# Altium PCB mchf_pro_ui.PcbDoc (part 5 of 6)
Units mm, origin at the board's own origin, x right, y up, seen from the top; angles counter-clockwise.
Board outline 200.09 x 143.79 mm, 2 copper layers (Top Layer, Bottom Layer); 329 components, 335 nets, 1276 pads, 515 vias.
Unrouted connection lines stored in the file: 91.
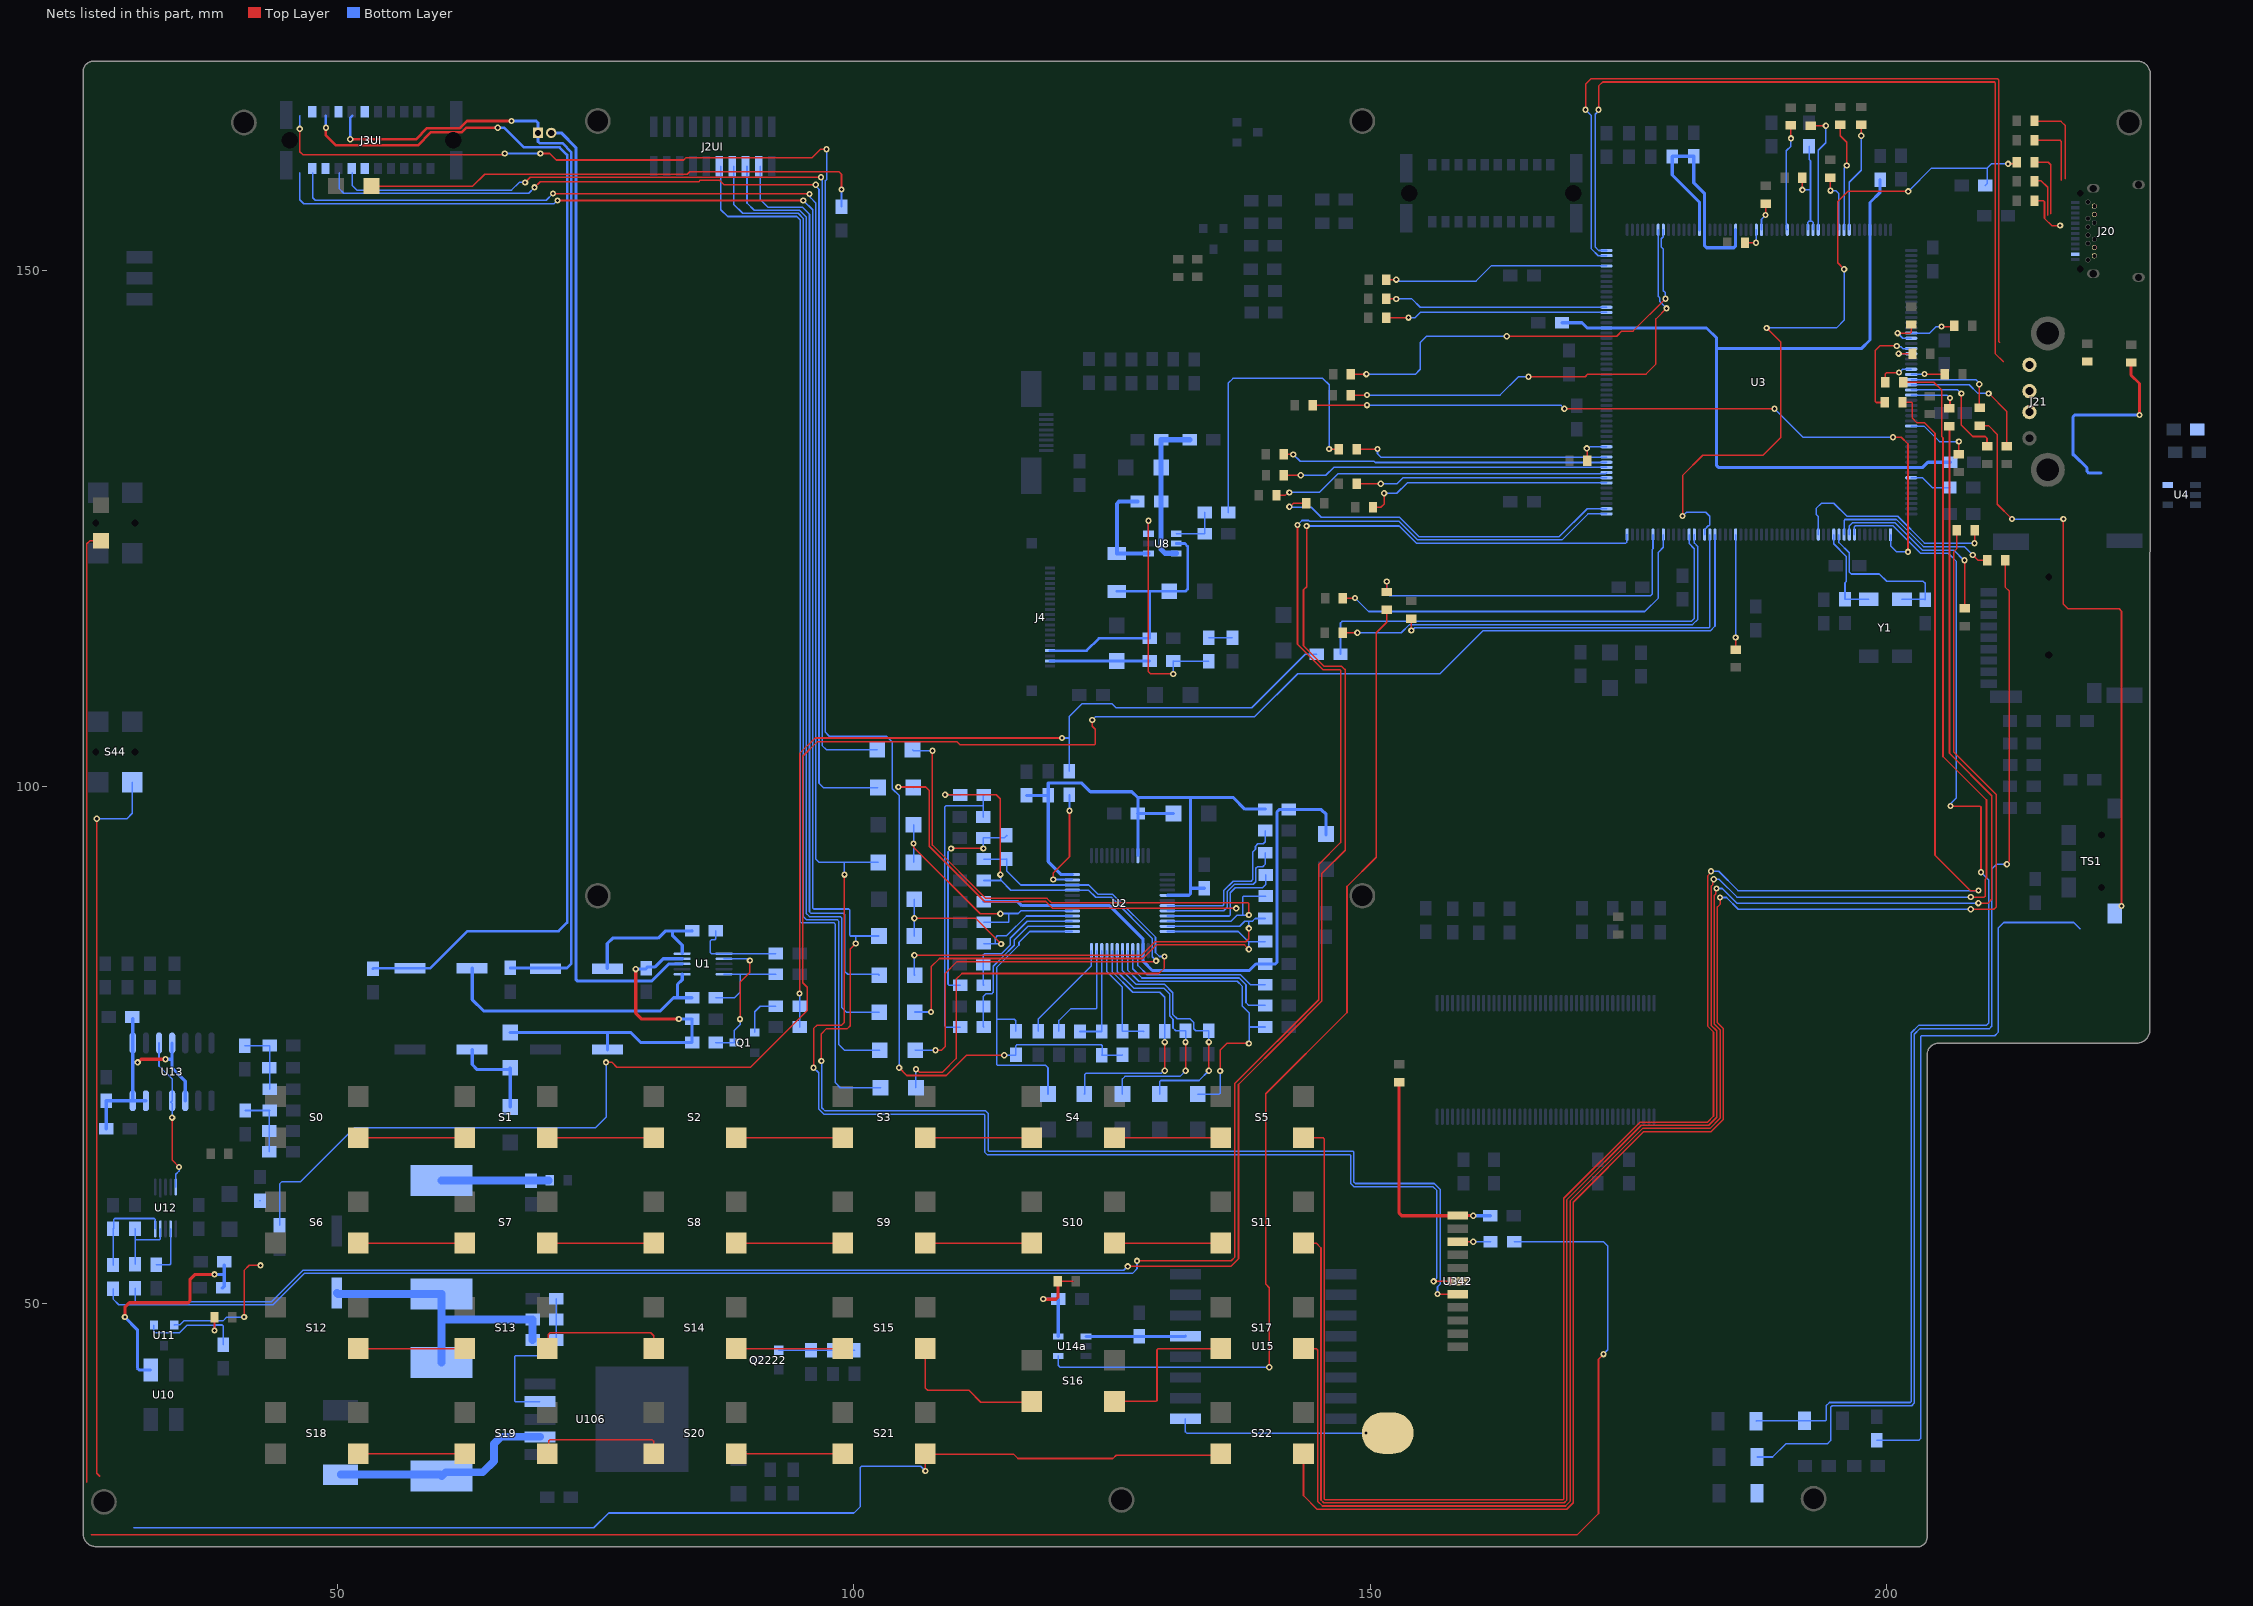
[diagram p4: the nets of this part, all layers, seen from the top]

## Via types
v1: diameter 0.61, hole 0.305, Top Layer to Bottom Layer, 511 vias
v2: diameter 0.762, hole 0.381, Top Layer to Bottom Layer, 4 vias

## Nets (pads, with @x,y where several pads share a name; then routed paths per layer and width w, separated by ;. In a path a pad name is that pad's centre, name@x,y a point inside that pad or via, vN(x,y) a via of type N, cw(c..) or ccw(c..) an arc to the next point about the centre after c; other vN are vias at no path point) (continued)
KEYPAD_Y1: M9.1 S5.4 | length 209.5
  Top Layer w0.152: S5.4@143.515,66.024 145.424,66.024 145.514,65.935 145.514,31.076 145.603,30.987 168.626,30.987 168.715,31.076 168.715,60.167 176.086,67.537 182.614,67.537 183.207,68.13 183.207,76.257 182.665,76.799 182.665,91.405 182.955,91.694 v1(182.955,91.818) ; M9.1@201.546,137.232 202.376,137.232 202.465,137.142 202.465,135.664 202.909,135.22 203.645,135.22 204.65,134.215 204.65,93.365 208.063,89.951 v1(208.861,89.951)
  Bottom Layer w0.152: v1(182.955,91.818) 183.709,91.818 185.576,89.951 v1(208.861,89.951)
KEYPAD_Y2: M13.1 S11.4 | length 202.5
  Top Layer w0.152: S11.4@143.515,55.83 144.744,55.83 145.209,55.365 145.209,32.063 145.209,31.297 145.209,30.95 145.477,30.682 168.752,30.682 169.02,30.95 169.02,31.299 169.02,32.745 169.02,60.04 176.212,67.232 182.741,67.232 183.512,68.004 183.512,76.383 182.97,76.925 182.97,90.375 183.146,90.551 183.146,90.967 v1(183.234,91.054) ; M13.1@201.564,139.168 204.536,139.168 205.298,138.406 205.298,133.911 205.42,133.788 205.42,102.933 209.633,98.719 209.633,91.139 209.515,91.021 209.515,89.412 209.426,89.323 v1(208.101,89.323)
  Bottom Layer w0.152: v1(183.234,91.054) 183.743,91.054 185.475,89.323 v1(208.101,89.323)
KEYPAD_Y3: M7.1 S17.4 | length 185.3
  Top Layer w0.152: S17.4@143.515,45.62 144.744,45.62 144.904,45.459 144.904,31.171 144.904,30.823 145.351,30.377 168.879,30.377 169.325,30.823 169.325,31.173 169.325,32.566 169.325,59.914 176.338,66.928 182.867,66.928 183.843,67.903 183.843,76.483 183.284,77.042 183.284,89.479 183.426,89.621 183.426,90.076 v1(183.504,90.154) ; M7.1@206.049,134.914 206.049,103.234 210.15,99.133 210.15,89.112 209.773,88.735 v1(208.844,88.735)
  Bottom Layer w0.152: v1(183.504,90.154) 184.052,90.154 185.472,88.735 v1(208.844,88.735)
KEYPAD_Y4: M6.1 S22.4 | length 165.3
  Top Layer w0.152: S22.4@143.515,35.435 143.515,31.387 144.83,30.072 169.005,30.072 169.63,30.697 169.63,59.788 176.465,66.623 182.993,66.623 184.16,67.789 184.16,76.597 183.589,77.168 183.589,88.36 183.843,88.614 v1(183.843,89.283) ; M6.1@206.768,124.825 206.768,123.057 206.448,122.737 206.448,103.388 210.574,99.262 210.574,88.37 210.343,88.139 v1(208.115,88.139)
  Bottom Layer w0.152: v1(183.843,89.283) 184.463,89.283 185.595,88.152 208.102,88.152 v1(208.115,88.139)
LCD_BL_A: C57.1 C58.2 D19.2 J4.4 U8.5 | length 27
  Bottom Layer w0.254: J4.4@118.975,113.175 122.509,113.175 123.705,114.37 C58.2@128.614,114.37 128.614,118.925 ; D19.2@125.446,118.91 125.461,118.925 128.614,118.925 ; U8.5@131.206,123.543 132.032,123.543 132.3,123.275 132.3,119.15 132.075,118.925 C57.1@130.527,118.925 128.614,118.925
LCD_BL_CTRL: M66.1 R48.1 | length 29.9
  Top Layer w0.152: v1(145.999,132.691) M66.1@146.941,132.691
  Bottom Layer w0.152: R48.1@136.242,126.55 136.242,139.075 136.692,139.525 145.388,139.525 145.999,138.914 v1(145.999,132.691)
LCD_BL_K: J4.2 R51.2 R52.2 | length 9.6
  Bottom Layer w0.254: J4.2@118.975,112.175 R52.2@125.446,112.175 R51.2@128.614,112.175
LCD_VDD: C53.2 C55.1 RFC4.2 RFC5.1 U8.6 | length 15
  Bottom Layer w0.508: U8.6@131.206,122.593 130.132,122.593 129.976,122.749 129.736,122.989 RFC5.1@129.736,127.619 C55.1@129.736,130.914 C53.2@129.736,133.6 RFC4.2@132.514,133.6
LINE_IN_L: C16.2 J3UI.A4 | length 112.5
  Top Layer w0.152: v1(69.075,158.02) 69.63,158.575 84.975,158.575 85.092,158.692 87.008,158.692 87.425,158.275 v1(96.31,158.275)
  Bottom Layer w0.152: 50.16,159.45 50.16,157.92 50.625,157.455 68.525,157.455 69.075,158.005 v1(69.075,158.02) ; v1(96.31,158.275) 96.31,158.151 96.615,157.846 96.615,100.335 97.025,99.925 C16.2@102.325,99.925
LINE_IN_R: C17.2 J3UI.A5 | length 107.9
  Top Layer w0.152: v1(68.175,158.5) 68.672,158.997 v1(96.817,158.997)
  Bottom Layer w0.152: 51.43,159.45 51.43,158.205 51.875,157.76 66.85,157.76 67.59,158.5 v1(68.175,158.5) ; v1(96.817,158.997) 96.831,158.997 96.92,158.908 96.92,103.995 97.34,103.575 C17.2@102.25,103.575
LINE_OUT_L: C10.2 J3UI.A1 U342.7 | length 227.8
  Top Layer w0.152: v1(71.303,156.75) v1(95.1,156.75) ; v1(96.85,73.45) 96.85,76.104 97.34,76.595 99.37,76.595 99.65,76.875 99.65,84.293 v1(100.182,84.825) ; v1(156.492,50.892) 158.438,50.892 U342.7@158.45,50.88
  Bottom Layer w0.152: 46.35,159.45 46.35,156.825 46.75,156.425 70.978,156.425 v1(71.303,156.75) ; v1(95.1,156.75) 96.006,155.844 96.006,88.261 96.095,88.172 99.488,88.172 99.577,88.082 99.577,85.647 99.666,85.558 100.182,85.558 ; v1(96.85,73.45) 96.89,73.41 96.89,68.932 97.202,68.62 112.757,68.62 112.987,68.39 112.987,64.793 113.076,64.704 148.312,64.704 148.401,64.615 148.401,61.744 148.549,61.596 156.187,61.596 156.739,61.044 156.739,51.851 156.492,51.604 v1(156.492,50.892) ; v1(100.182,84.825) 100.182,85.558 ; C10.2@102.42,85.558 100.182,85.558
LINE_OUT_R: C11.2 J3UI.A2 U342.6 | length 226.5
  Top Layer w0.152: v1@70.836,157.389 v1(95.701,157.389) ; v1(96.095,72.8) 96.095,76.595 96.425,76.925 98.8,76.925 99.083,77.208 v1(99.083,91.495) ; v1(156.113,52.126) 158.426,52.126 U342.6@158.45,52.15
  Bottom Layer w0.152: 47.62,159.45 47.62,157.005 47.85,156.775 70.221,156.775 v1(70.878,157.433) ; v1(95.701,157.389) 95.788,157.302 95.788,157.041 96.31,156.519 96.31,92.998 96.633,92.675 99.083,92.675 ; v1(96.095,72.8) 96.586,72.309 96.586,68.805 97.076,68.315 112.593,68.315 112.682,68.226 112.682,64.605 112.888,64.399 148.007,64.399 148.096,64.31 148.096,61.607 148.412,61.291 156.061,61.291 156.434,60.917 156.434,52.447 v1(156.113,52.126) ; v1(99.083,91.495) 99.083,92.675 ; C11.2@102.345,92.675 99.083,92.675
LO_SCL: R57.2 U3.52 | length 220.3
  Top Layer w0.152: v1(126.5,53.575) 136.49,53.575 137.225,54.31 137.225,71.185 142.175,76.135 142.175,76.15 145.293,79.268 145.293,91.594 147.563,93.864 147.563,111.362 147.5,111.362 147.195,111.667 145.491,111.667 143.519,113.639 143.519,119.069 143.824,119.374 v1(143.824,125.245)
  Bottom Layer w0.152: R57.2@30.412,51.476 30.412,50.256 30.501,50.167 43.636,50.167 46.665,53.196 126.121,53.196 v1(126.5,53.575) ; v1(143.824,125.245) 152.789,125.245 154.443,123.592 174.732,123.592 174.821,123.681 174.821,124.386 U3.52@174.849,124.414
LO_SDA: R58.2 U3.53 | length 221.9
  Top Layer w0.152: v1(127.401,54.108) 136.514,54.108 136.883,54.477 136.883,71.289 144.988,79.394 144.988,92.481 147.109,94.601 147.109,111.253 147.019,111.342 145.385,111.342 142.939,113.788 v1(142.939,125.347)
  Bottom Layer w0.152: R58.2@28.286,51.425 28.286,50.414 28.838,49.862 43.762,49.862 46.791,52.891 126.958,52.891 127.401,53.334 v1(127.401,54.108) ; v1(142.939,125.347) 143.371,125.779 144.045,125.779 144.118,125.706 152.76,125.706 154.569,123.897 168.539,123.897 171.056,126.414 U3.53@172.849,126.414
LORA_POWER: M61.1 U14a.4 | length 99.7
  Top Layer w0.152: v1(140.203,43.816) 140.203,51.517 139.86,51.861 139.86,70.273 147.731,78.145 147.731,90.35 150.555,93.173 150.555,114.9 151.575,115.92 M61.1@151.575,117.139
  Bottom Layer w0.152: U14a.4@119.775,44.9 119.775,43.994 119.952,43.816 v1(140.203,43.816)
MIC_IN: C18.2 C19.2 J3UI.A11 R13.1 | length 175.2
  Top Layer w0.152: v1(46.354,163.685) 46.354,161.478 46.661,161.171 66.071,161.171 v1(66.2,161.3) ; v1(69.65,161.3) 70.549,161.3 71.175,160.674 83.525,160.674 83.754,160.903 95.953,160.903 96.764,161.714 v1(97.351,161.714) ; v1(104.375,72.8) 105.125,72.05 108.941,72.05 110.904,74.013 v1(114.551,74.013)
  Bottom Layer w0.152: 46.35,164.95 46.354,164.946 v1(46.354,163.685) ; v1(66.2,161.3) v1(69.65,161.3) ; v1(97.351,161.714) 97.35,158.776 97.225,158.651 97.225,105.291 97.616,104.9 103.15,104.9 103.719,104.331 103.719,99.802 104.375,99.146 v1(104.375,72.8) ; v1(114.551,74.013) 115.644,74.013 R13.1@115.679,74.048 115.679,74.93 115.769,75.019 123.938,75.019 124.027,74.93 124.027,74.06 C19.2@123.992,74.025 125.969,74.025 C18.2@125.992,74.048
MUTE: C3.2 R11.2 R12.1 R31.2 | length 85.3
  Top Layer w0.152: v1(94.736,79.984) 94.736,103.211 96.25,104.725 v1(120.139,104.725)
  Bottom Layer w0.152: C3.2@94.736,76.738 R11.2@94.736,78.763 v1(94.736,79.984) ; v1(120.139,104.725) 120.844,104.725 ; R12.1@120.844,101.521 120.844,104.725 ; R31.2@144.814,112.825 143.684,112.825 143.351,112.492 138.509,107.651 125.366,107.651 124.992,108.025 122.068,108.025 120.844,106.801 120.844,104.725
NetC1_1: C1.1 R5.1 U1.10 | length 13.7
  Bottom Layer w0.305: C1.1@76.125,82.4 76.125,84.825 76.65,85.35 81.05,85.35 81.725,86.025 82.425,86.025 ; U1.10@83.375,83.85 83.375,84.675 82.425,85.625 82.425,86.025 ; R5.1@84.339,86.067 84.297,86.025 82.425,86.025
NetC2_1: C2.1 R6.1 U1.6 | length 27.8
  Bottom Layer w0.305: C2.1@63.05,82.433 63.05,79.4 64.15,78.3 81.25,78.3 82.534,79.584 82.9,79.584 ; U1.6@83.375,81.85 83.375,81.325 82.925,80.875 82.925,79.609 82.9,79.584 ; R6.1@84.339,79.584 82.9,79.584
NetC4_2: C4.2 C5.1 R3.1 R4.1 R9.2 U1.9 | length 36.9
  Top Layer w0.305: v1(78.875,82.35) 78.875,78.093 79.463,77.505 83.043,77.505 v1(83.055,77.517)
  Bottom Layer w0.305: R9.2@66.725,76.219 76.125,76.219 ; C5.1@76.154,74.55 C5.1@76.129,74.575 76.129,76.215 76.125,76.219 ; v1(78.875,82.35) 79.823,82.35 80.035,82.562 80.756,82.562 81.543,83.35 U1.9@83.375,83.35 ; v1(83.055,77.517) 84.322,77.517 R3.1@84.339,77.5 R4.1@84.339,75.239 79.386,75.239 78.406,76.219 76.125,76.219
NetC6_1: C6.1 R9.1 R10.2 | length 9.2
  Bottom Layer w0.305: C6.1@63.05,74.575 63.05,73.111 63.536,72.625 66.56,72.625 R9.1@66.725,72.79 R10.2@66.725,69.005
NetC7_1: C7.1 CC5.1 CC36.1 CC46.1 M1.1 RFC1.1 U2.5 U2.36 U2.46 | length 56.6
  Bottom Layer w0.305: M1.1@116.704,99.164 118.77,99.164 CC36.1@118.806,99.199 ; U2.36@121.142,91.493 120.069,91.493 118.806,92.756 CC36.1@118.806,99.199 ; CC46.1@127.47,97.427 127.492,97.449 127.492,98.93 126.899,99.524 122.891,99.524 122.057,100.357 118.806,100.357 CC36.1@118.806,99.199 ; 127.476,98.947 132.548,98.947 ; U2.46@127.492,93.343 127.492,97.422 C7.1@130.925,97.422 ; U2.5@130.342,89.493 132.412,89.493 132.59,89.672 132.59,90.182 ; CC5.1@133.906,90.173 132.6,90.173 132.59,90.182 ; RFC1.1@139.853,97.841 137.845,97.841 136.739,98.947 132.548,98.947 ; 132.548,98.947 132.59,98.905 132.59,90.182
NetC8_1: C8.1 C10.1 CC28.2 U2.28 | length 23.6
  Top Layer w0.152: v1(105.849,87.27) 111.766,87.27 v1(114.249,84.787)
  Bottom Layer w0.152: C8.1@105.849,89.117 v1(105.849,87.27) C10.1@105.849,85.558 C10.1@105.852,85.56 ; CC28.2@112.55,84.811 113.696,84.811 ; v1(114.249,84.787) 114.225,84.811 113.696,84.811 ; U2.28@121.142,87.493 116.704,87.493 114.778,85.568 113.876,85.568 113.696,85.388 113.696,84.811
NetC9_1: C9.1 C11.1 CC29.2 U2.29 | length 25.4
  Top Layer w0.152: v1(105.774,94.503) 105.774,94.151 112.218,87.708 v1(114.174,87.708)
  Bottom Layer w0.152: C11.1@105.774,92.675 C9.1@105.774,96.33 ; CC29.2@112.57,86.877 114.953,86.877 115.003,86.926 115.003,87.731 ; v1(114.174,87.708) 114.198,87.731 115.003,87.731 ; U2.29@121.142,87.993 116.179,87.993 115.918,87.731 115.003,87.731
NetC12_1: C12.1 CC33.1 R14.1 U2.33 | length 67
  Top Layer w0.152: v1(107.9,74.5) 108.481,74.5 108.831,74.85 108.831,81.931 109.976,83.076 129.182,83.076 v1(129.252,83.145) v1@129.322,83.145 ; v1(108.831,99.233) 113.771,99.233 114.174,98.83 v1(114.174,91.495)
  Bottom Layer w0.152: C12.1@105.929,74.5 v1(107.9,74.5) ; v1(108.831,99.233) 110.243,99.233 R14.1@110.276,99.199 ; CC33.1@112.551,90.927 114.198,90.927 ; v1(114.174,91.495) 114.198,91.472 114.198,90.927 ; v1(129.252,83.145) 129.252,83.174 128.889,83.537 128.889,85.322 124.913,89.298 123.401,89.298 122.705,89.993 U2.33@121.142,89.993 115.192,89.993 114.259,90.927 114.198,90.927
NetC12_2: C12.2 J2UI.A14 | length 98.3
  Bottom Layer w0.152: J2UI.A14@88.38,160.07 88.38,156.35 89.225,155.505 94.603,155.505 95.091,155.017 95.091,87.444 95.406,87.13 98.384,87.13 98.512,87.002 98.512,75.071 99.083,74.5 C12.2@102.5,74.5
NetC13_1: C13.1 CC34.1 R16.1 U2.34 | length 58.7
  Top Layer w0.152: v1(106.004,72.661) 106.047,72.661 106.322,72.386 108.586,72.386 109.888,73.688 109.888,81.363 110.45,81.925 129.512,81.925 130.056,82.469 v1(130.056,83.573)
  Bottom Layer w0.152: C13.1@106.004,70.875 v1(106.004,72.661) ; CC34.1@112.548,92.998 114.787,92.998 R16.1@114.798,93.008 114.798,91.838 116.143,90.492 121.141,90.492 122.734,90.493 123.625,89.603 125.039,89.603 129.194,85.448 129.194,83.95 129.571,83.573 v1(130.056,83.573)
NetC13_2: C13.2 J2UI.A15 | length 103.7
  Bottom Layer w0.152: J2UI.A15@87.11,160.07 87.11,155.865 87.775,155.2 94.477,155.2 94.786,154.891 94.786,86.97 94.931,86.825 98.079,86.825 98.207,86.697 98.207,71.343 98.675,70.875 C13.2@102.575,70.875
NetC14_1: C14.1 CC11.2 U2.11 | length 46.5
  Top Layer w0.152: v1(105.849,83.695) 127.844,83.695 129.146,84.997 137.934,84.997 138.226,85.289 v1(138.226,86.292)
  Bottom Layer w0.152: v1(105.849,83.695) 105.849,81.781 C14.1@105.88,81.75 ; U2.11@130.342,86.493 137.341,86.493 137.841,86.993 138.21,86.993 ; v1(138.226,86.292) 138.21,86.308 138.21,86.993 ; CC11.2@139.834,87.248 138.834,87.248 138.579,86.993 138.21,86.993
NetC14_2: C14.2 J2UI.A12 | length 88.6
  Bottom Layer w0.152: J2UI.A12@90.92,160.07 90.92,156.844 91.65,156.114 94.996,156.114 95.701,155.409 95.701,87.888 95.85,87.739 98.994,87.739 99.121,87.612 99.121,82.124 99.4,81.845 102.356,81.845 C14.2@102.451,81.75
NetC15_1: C15.1 CC12.2 U2.12 | length 48.4
  Top Layer w0.152: v1(107.465,78.2) 107.465,82.571 108.275,83.381 127.961,83.381 129.272,84.692 137.808,84.692 v1(138.226,84.274)
  Bottom Layer w0.152: C15.1@105.88,78.184 105.896,78.2 v1(107.465,78.2) ; U2.12@130.342,85.993 137.211,85.993 138.193,85.011 138.21,85.011 ; v1(138.226,84.274) 138.21,84.29 138.21,85.011 ; CC12.2@139.834,85.011 138.21,85.011
NetC15_2: C15.2 J2UI.A13 | length 93.4
  Bottom Layer w0.152: J2UI.A13@89.65,160.07 89.65,156.51 90.35,155.81 94.729,155.81 95.396,155.143 95.396,87.728 95.689,87.435 98.689,87.435 98.816,87.307 98.816,78.645 99.278,78.184 C15.2@102.451,78.184
NetC16_1: C16.1 CC9.1 U2.9 | length 55.8
  Top Layer w0.152: v1(104.3,99.975) 106.958,99.975 107.295,99.637 107.295,94.238 112.652,88.881 116.412,88.881 116.422,88.891 118.562,88.891 119.221,88.232 v1(137.007,88.232)
  Bottom Layer w0.152: v1(104.3,99.975) 105.704,99.975 C16.1@105.754,99.925 ; U2.9@130.342,87.493 136.346,87.493 136.435,87.582 136.435,88.232 ; v1(137.007,88.232) 136.435,88.232 ; CC9.1@139.853,91.468 139.853,90.531 139.54,90.217 136.922,90.217 136.435,89.73 136.435,88.232
NetC17_1: C17.1 CC10.1 U2.10 | length 57.3
  Top Layer w0.152: v1(107.6,103.49) 107.6,94.365 112.769,89.196 118.689,89.196 119.119,88.766 138.137,88.766 138.226,88.677 v1(138.226,87.582)
  Bottom Layer w0.152: C17.1@105.679,103.575 105.764,103.49 v1(107.6,103.49) ; U2.10@130.342,86.993 136.507,86.993 137.096,87.582 137.626,87.582 ; v1(138.226,87.582) 137.663,87.582 137.626,87.619 137.626,89.328 137.716,89.417 CC10.1@139.843,89.417
NetC18_1: C18.1 CC21.1 U2.21 | length 10.5
  Bottom Layer w0.152: U2.21@124.492,84.143 124.492,82.093 125.992,80.593 C18.1@125.992,76.334 128.012,76.334 128.035,76.311 CC21.1@128.058,76.334
NetC19_1: C19.1 CC22.1 U2.22 | length 10
  Bottom Layer w0.152: CC22.1@121.868,76.311 C19.1@123.992,76.311 U2.22@123.992,84.143
NetC34d_2: C34d.2 U14a.1 U15.13 | length 9.6
  Bottom Layer w0.305: U14a.1@122.475,46.8 132.063,46.8 U15.13@132.088,46.825
NetC39_1: C39.1 U3.11 Y1.1 | length 15.7
  Bottom Layer w0.152: U3.11@195.349,124.414 195.349,123.643 196.344,122.648 196.344,120.793 196.541,120.597 199.261,120.597 199.965,119.893 203.493,119.893 203.696,119.689 C39.1@203.696,118.108 203.667,118.137 Y1.1@201.449,118.137
NetC40_2: C40.2 U3.12 Y1.4 | length 9.1
  Bottom Layer w0.152: U3.12@194.849,124.414 194.849,123.513 196.039,122.324 196.039,119.836 195.938,119.736 C40.2@195.938,118.139 195.94,118.137 Y1.4@198.249,118.137
NetC42_2: C42.2 M25.2 U4.5 | length 19.2
  Top Layer w0.305: M25.2@223.59,141.038 M25.2@223.62,141.068 ; M25.2@223.62,141.02 223.62,139.85 224.439,139.031 v1(224.439,135.982)
  Bottom Layer w0.305: 220.685,130.364 219.54,130.364 219.361,130.543 219.361,130.87 218.127,132.104 218,132.104 218,135.803 218.179,135.982 v1(224.439,135.982)
NetC56_1: C56.1 R50.1 | length 2.3
  Bottom Layer w0.152: R50.1@134.354,114.445 C56.1@136.636,114.445
NetC67_2: C67.2 M35.1 M36.1 U13.1 U13.4 U13.10 U13.13 U13.14 | length 24.4
  Top Layer w0.305: v1(30.664,73.324) 30.688,73.324 30.995,73.631 v1(33.361,73.631)
  Bottom Layer w0.305: M36.1@27.628,66.892 27.622,66.898 C67.2@27.622,69.611 27.626,69.608 U13.14@30.193,69.608 ; M35.1@30.193,77.571 U13.1@30.193,75.196 30.193,73.324 ; v1(30.664,73.324) 30.193,73.324 ; U13.13@31.463,69.608 U13.14@30.193,69.608 ; v1(33.361,73.631) 33.866,73.631 ; U13.4@34.003,75.196 34.003,72.78 35.273,71.51 U13.10@35.273,69.608 ; U13.14@30.193,69.608 30.193,73.324
NetC68_1: C68.1 C69.2 R61.2 R62.1 | length 6.4
  Bottom Layer w0.152: R61.2@41.075,68.661 C68.1@43.436,68.661 ; C69.2@43.416,64.667 43.416,68.641 C68.1@43.436,68.661 ; C68.1@43.45,68.675 C68.1@43.436,68.661
NetC70_1: C70.1 C71.1 R63.2 R64.1 | length 6.6
  Bottom Layer w0.152: R63.2@41.025,74.95 C70.1@43.435,74.95 C71.1@43.435,70.725
NetC72_2: C72.2 RFC6.1 U10.4 | length 22.2
  Top Layer w0.305: v1(29.429,48.67) 29.429,49.62 29.859,50.05 35.545,50.05 35.724,50.229 35.724,52.279 36.245,52.8 v1(38.1,52.8)
  Bottom Layer w0.305: v1(29.429,48.67) 30.642,47.457 30.642,43.723 30.82,43.544 U10.4@31.919,43.544 ; v1(38.1,52.8) 38.967,52.8 39.042,52.875 ; C72.2@38.861,51.467 39.042,51.648 39.042,52.875 ; RFC6.1@39.042,53.688 39.042,52.875
NetC73_1: C73.1 M34a.1 U11.1 | length 11.3
  Top Layer w0.152: v1(38.1,47.375) M34a.1@38.1,48.643
  Bottom Layer w0.152: U11.1@32.239,47.893 32.239,47.245 32.328,47.155 34.726,47.155 35.465,47.895 38.1,47.895 ; v1(38.1,47.375) 38.1,47.9 38.868,47.9 38.957,47.81 C73.1@38.957,46.009
NetC74g_2: C74g.2 M42.2 U14a.5 | length 8.1
  Top Layer w0.305: v1(118.325,50.411) 118.347,50.389 119.564,50.389 119.743,50.568 M42.2@119.743,52.125
  Bottom Layer w0.305: v1(118.325,50.411) 119.775,50.411 U14a.5@119.775,46.8
NetC176_1: C176.1 R134.2 R135.1 U106.4 | length 16.3
  Bottom Layer w0.152: U106.4@69.6,40.481 67.244,40.481 67.15,40.575 67.15,44.818 67.257,44.925 71.092,44.925 71.181,45.014 C176.1@71.181,46.438 R134.2@71.181,48.434 R135.1@71.181,50.438
NetC176_2: C176.2 C177.1 L128.2 R134.1 RFC102.1 | length 27.6
  Bottom Layer w0.762: C177.1@49.946,51.007 50.055,50.898 RFC102.1@60.1,50.898 60.094,50.892 60.094,48.434 ; L128.2@60.094,44.266 60.094,48.434 ; C176.2@68.895,46.438 R134.1@68.895,48.434 60.094,48.434
NetC178_1: C178.1 M120.1 RFC102.2 | length 10.4
  Bottom Layer w0.762: RFC102.2@60.094,61.898 68.75,61.898 M120.1@70.462,61.898
NetC222_1: C222.1 Q2222.1 R222.2 R333.1 | length 7.3
  Bottom Layer w0.152: Q2222.1@92.725,45.455 100.056,45.455 R222.2@100.064,45.462
NetC751_2: C751.2 M101s.2 U342.1 | length 21.6
  Top Layer w0.305: M101s.2@152.775,71.41 152.775,58.729 153.029,58.475 158.45,58.475 158.462,58.488 159.944,58.488 v1(159.956,58.475)
  Bottom Layer w0.305: v1(159.956,58.475) C751.2@161.6,58.475
NetCC7_2: CC7.2 U2.7 | length 15.7
  Bottom Layer w0.152: U2.7@130.342,88.493 135.706,88.493 135.795,88.582 135.795,89.953 136.708,90.865 138.465,90.865 138.593,90.993 138.593,93.665 138.87,93.943 138.87,94.241 139.102,94.473 139.626,94.473 139.824,94.67 CC7.2@139.824,95.758
NetCC8_2: CC8.2 U2.8 | length 14.1
  Bottom Layer w0.152: U2.8@130.342,87.993 135.795,87.993 136.13,88.328 136.13,89.857 136.834,90.56 138.651,90.56 138.897,90.807 138.897,92.106 139.06,92.268 139.578,92.268 139.834,92.524 CC8.2@139.834,93.611
NetCC14_2: CC14.2 CC14E.1 CC30.2 RFC1.2 U2.14 U2.30 | length 54.3
  Bottom Layer w0.305: CC30.2@112.57,88.88 115.874,88.88 116.261,88.493 124.748,88.493 127.992,85.249 127.992,83.121 128.895,82.218 138.281,82.218 138.908,82.845 CC14.2@139.823,82.845 139.825,82.842 140.8,82.842 140.956,82.997 140.956,97.575 141.169,97.787 RFC1.2@142.091,97.787 145.251,97.787 145.705,97.334 CC14E.1@145.705,95.351
NetCC15_2: CC15.2 U2.15 | length 14.5
  Bottom Layer w0.152: U2.15@127.492,84.143 127.492,82.7 128.39,81.802 137.416,81.802 138.388,80.83 CC15.2@139.805,80.83
NetCC16_2: CC16.2 U2.16 | length 17.1
  Bottom Layer w0.152: U2.16@126.992,84.143 126.992,82.377 127.88,81.488 137.298,81.488 137.954,80.833 137.954,79.111 138.226,78.839 CC16.2@139.805,78.839
NetCC17_2: CC17.2 CC17E.1 U2.17 | length 30.4
  Top Layer w0.152: v1(135.447,72.481) 135.447,74.522 136.083,75.158 v1(138.226,75.158)
  Bottom Layer w0.152: U2.17@126.492,84.143 126.492,82.271 127.58,81.183 137.096,81.183 137.606,80.674 137.606,78.757 138.281,78.081 138.281,76.833 ; CC17E.1@133.292,70.254 135.358,70.254 135.447,70.343 v1(135.447,72.481) ; v1(138.226,75.158) 138.281,75.213 138.281,76.833 ; CC17.2@139.812,76.744 138.371,76.744 138.281,76.833
NetCC18_1: CC18.1 CC18E.1 U2.18 | length 24.6
  Top Layer w0.152: v1(134.354,72.509) v1(134.354,75.283)
  Bottom Layer w0.152: U2.18@125.992,84.143 125.992,82.187 127.3,80.879 130.058,80.879 130.864,80.072 130.864,77.959 131.287,77.537 132.538,77.537 132.903,77.172 132.903,76.573 133.095,76.381 CC18.1@134.354,76.381 v1(134.354,75.283) ; CC18E.1@129.607,70.254 129.607,71.476 129.697,71.565 133.409,71.565 v1(134.354,72.509)
NetCC19_2: CC19.2 CC19E.1 U2.19 | length 24.5
  Top Layer w0.152: v1(132.103,75.283) 132.104,75.282 v1(132.106,72.509) v1(132.106,72.509)
  Bottom Layer w0.152: U2.19@125.492,84.143 125.492,82.102 127.08,80.515 129.991,80.515 130.56,79.946 130.56,77.83 130.887,77.503 130.887,76.65 131.158,76.379 CC19.2@132.103,76.379 v1(132.103,75.283) ; CC19E.1@125.992,70.254 125.992,71.714 126.237,71.959 131.556,71.959 v1(132.106,72.509)
NetCC20_1: CC20.1 CC20E.1 U2.20 | length 25.1
  Top Layer w0.152: v1(130.087,72.509) v1(130.087,75.283)
  Bottom Layer w0.152: CC20E.1@122.304,70.254 122.335,70.284 122.335,72.155 122.467,72.287 129.769,72.287 129.991,72.509 v1(130.087,72.509) ; U2.20@124.992,84.143 124.992,82.111 126.986,80.117 129.606,80.117 130.087,79.637 CC20.1@130.087,76.334 v1(130.087,75.283)
NetCC23_2: CC23.2 U2.23 | length 10.7
  Bottom Layer w0.152: CC23.2@119.845,76.334 119.845,77.372 120.972,78.499 123.403,78.499 123.492,78.588 U2.23@123.492,84.143
NetCC24_2: CC24.2 U2.24 | length 9.9
  Bottom Layer w0.152: CC24.2@117.849,76.332 117.849,77.529 122.992,82.672 U2.24@122.992,84.143
NetCC25_1: CC25.1 R13.2 U2.25 | length 28.9
  Bottom Layer w0.152: R13.2@115.679,76.334 115.679,77.343 115.517,77.505 113.806,77.505 ; CC25.1@118.784,70.254 118.784,72.809 118.536,73.056 113.895,73.056 113.806,73.145 113.806,77.505 ; U2.25@121.142,85.993 117.014,85.993 115.98,84.958 115.98,84.681 113.806,82.507 113.806,77.505
NetCC26_1: CC26.1 CC26a.2 U2.26 | length 16.2
  Bottom Layer w0.152: CC26a.2@112.57,76.738 112.531,76.777 CC26.1@112.531,78.74 112.531,79.714 112.8,79.984 113.363,79.984 113.497,80.118 113.497,82.629 114.293,83.425 115.522,84.654 115.522,85.157 116.858,86.493 U2.26@121.142,86.493
NetCC26a_1: CC26a.1 R14.2 R15.1 | length 28.7
  Bottom Layer w0.152: CC26a.1@110.284,76.738 108.921,76.738 108.801,76.858 108.801,98.039 108.921,98.159 112.437,98.159 112.526,98.069 ; R15.1@112.526,97.071 112.526,98.069 ; R14.2@112.562,99.199 112.526,99.164 112.526,98.069
NetCC27_1: CC27.1 CC27a.2 U2.27 | length 13.3
  Bottom Layer w0.152: CC27a.2@112.57,80.784 112.526,80.827 CC27.1@112.526,82.78 112.526,83.731 112.616,83.82 114.257,83.82 115.12,84.683 115.12,85.335 116.778,86.993 116.956,86.993 U2.27@121.142,86.993
NetCC27a_1: CC27a.1 R16.2 R17.1 | length 21
  Top Layer w0.152: v1(109.407,94.034) v1(112.526,94.034)
  Bottom Layer w0.152: v1(109.407,94.034) 109.407,93.986 109.106,93.684 109.106,80.873 109.195,80.784 CC27a.1@110.284,80.784 ; v1(112.526,94.034) R17.1@112.526,95.048 114.551,95.048 R16.2@114.798,95.294 R16.2@114.817,95.275
NetCP89_2: CP89.2 CP152.2 CP199.2 U3.89 U3.152 U3.199 | length 82
  Bottom Layer w0.305: CP89.2@168.541,144.914 170.474,144.914 170.974,144.414 U3.89@172.849,144.414 182.528,144.414 183.504,143.439 183.504,142.414 ; CP152.2@199.338,158.774 199.338,157.551 198.349,156.562 U3.152@198.349,153.914 198.349,143.25 197.513,142.414 183.504,142.414 ; CP199.2@206.138,131.42 203.961,131.42 203.455,130.914 U3.199@202.349,130.914 183.682,130.914 183.504,131.093 183.504,142.414
NetCP119_1: CP119.1 CP119E.1 U3.119 U3.120 U3.126 | length 24.1
  Bottom Layer w0.305: U3.119@181.849,153.914 181.849,156.579 179.207,159.221 CP119E.1@179.207,161.012 179.229,161.033 CP119.1@181.287,161.033 181.287,158.463 182.349,157.401 U3.120@182.349,153.914 182.349,152.355 182.528,152.177 185.171,152.177 185.349,152.355 U3.126@185.349,153.914
NetCP140_1: CP140.1 M22.2 U3.140 U3.141 | length 11.3
  Top Layer w0.152: v1(191.81,157.783) M22.2@191.81,158.965
  Bottom Layer w0.152: v1(191.81,157.783) 192.593,157.783 ; U3.140@192.349,153.914 192.349,154.642 192.438,154.731 192.593,154.731 ; CP140.1@192.458,162.009 192.458,160.746 192.593,160.611 192.593,157.783 ; U3.141@192.849,153.914 192.849,154.631 192.748,154.731 192.593,154.731 ; 192.593,154.731 192.593,157.783
NetD17_2: D17.2 D18.2 U3.8 | length 120.4
  Top Layer w0.152: v1(206.14,98.129) 209.011,98.129 209.1,98.04 v1(209.1,91.722)
  Bottom Layer w0.152: D17.2@187.333,38.6 187.358,38.625 D18.2@192.017,38.625 194.042,38.625 194.131,38.714 194.131,40.097 194.435,40.4 202.248,40.4 202.338,40.489 202.338,76.178 203.06,76.9 209.609,76.9 209.842,77.134 209.842,90.98 v1(209.1,91.722) ; U3.8@196.849,124.414 196.849,125.171 196.938,125.26 200.577,125.26 203.233,122.604 205.918,122.604 206.719,121.804 206.719,98.944 206.14,98.365 v1(206.14,98.129)
NetD19_1: D19.1 RFC5.2 U8.1 | length 10
  Bottom Layer w0.381: RFC5.2@127.45,127.619 125.669,127.619 125.446,127.396 D19.1@125.446,122.593 U8.1@128.506,122.593
NetD108_2: D108.2 L128.1 U106.2 | length 21.9
  Bottom Layer w0.762: D108.2@50.319,33.416 59.949,33.416 L128.1@60.1,33.266 60.484,33.65 64.075,33.65 65.15,34.725 65.15,36.4 65.828,37.078 U106.2@69.6,37.078
NetJ20_A11: J20.A11 M1c.1 | length 4.4
  Top Layer w0.152: M1c.1@214.277,156.707 215.159,156.707 215.248,156.618 215.248,155.017 215.94,154.325 v1(216.761,154.325)
  Bottom Layer w0.152: v1(216.761,154.325) v1@216.771,154.335
NetJ20_B2: J20.B2 M1e.2 | length 4.2
  Top Layer w0.152: M1e.2@214.315,158.668 214.912,158.668 215.553,158.027 215.553,155.335
NetJ20_B3: J20.B3 M1d.1 | length 6.4
  Top Layer w0.152: M1d.1@214.277,160.458 215.617,160.458 215.858,160.217 215.858,155.461
NetJ20_B10: J20.B10 M1a.1 | length 6.4
  Top Layer w0.152: M1a.1@214.277,162.58 216.761,162.58 216.85,162.49 216.85,158.711
NetJ20_B11: J20.B11 M1b.1 | length 8.3
  Top Layer w0.152: M1b.1@214.277,164.45 214.322,164.406 216.85,164.406 217.25,164.006 217.25,158.858
NetJ21_4: J21.4 M121.2
NetLD1_1: LD1.1 R47.2 | length 49.3
  Top Layer w0.152: LD1.1@53.3,158.15 63.1,158.15 64.252,159.302 83.877,159.302 84.105,159.53 98.55,159.53 98.8,159.28 v1(98.8,157.825)
  Bottom Layer w0.152: R47.2@98.8,156.133 v1(98.8,157.825)
NetLD2_1: LD2.1 R389.2 | length 274.6
  Top Layer w0.152: 25.737,32.675 25.737,123.516 26.046,123.825 LD2.1@27.125,123.825 ; 26.191,27.613 170.037,27.613 172.074,29.65 172.074,44.593 v1(172.561,45.08)
  Bottom Layer w0.152: R389.2@163.905,55.959 172.566,55.959 172.975,55.55 172.975,45.494 v1(172.561,45.08)
"NetLora Ant_1": "LORA ANT.1" U15.9 | length 18.8
  Bottom Layer w0.152: U15.9@132.088,38.825 132.075,38.812 132.075,37.564 132.198,37.441 v1(149.564,37.441)
NetM41_2: M41.2 U11.2 | length 13.4
  Top Layer w0.152: v1(40.97,48.67) 40.97,53.17 41.475,53.675 v1(42.55,53.675)
  Bottom Layer w0.152: U11.2@34.199,47.893 34.209,47.904 34.738,47.904 35.132,48.298 38.925,48.298 39.296,48.67 v1(40.97,48.67) ; M41.2@42.5,59.939 M41.2@42.513,59.926
NetP324_2: P324.2 U1.8 | length 94.5
  Bottom Layer w0.305: P324.2@70.691,163.297 71.67,163.297 73.082,161.885 73.082,150.276 73.082,81.366 73.26,81.187 80.407,81.187 82.07,82.85 U1.8@83.375,82.85
NetQ1_1: Q1.1 R11.1 | length 4.3
  Bottom Layer w0.152: Q1.1@90.4,76.219 90.4,78.225 90.938,78.763 R11.1@92.45,78.763
NetQ1_3: Q1.3 R4.2 U1.2 | length 12.9
  Top Layer w0.152: v1(88.981,77.505) 88.981,81.073 89.927,82.018 89.927,83.173 v1(89.925,83.175)
  Bottom Layer w0.152: R4.2@86.625,75.239 Q1.3@88.4,75.239 88.4,76.375 88.981,76.956 v1(88.981,77.505) ; U1.2@87.425,83.35 89.626,83.35 89.801,83.175 v1(89.925,83.175)
NetR1_1: R1.1 R5.2 U1.1 | length 8.9
  Bottom Layer w0.152: R5.2@86.625,86.067 86.625,85.287 86.536,85.197 86.235,85.197 86.1,85.063 86.1,83.958 86.208,83.85 U1.1@87.425,83.85 88.981,83.85 R1.1@92.45,83.85
NetR2_1: R2.1 R6.2 U1.5 | length 9.3
  Bottom Layer w0.152: R6.2@86.625,79.584 88.447,79.584 88.981,80.118 88.981,81.85 ; U1.5@87.425,81.85 88.981,81.85 ; R2.1@92.45,81.85 88.981,81.85
NetR12_2: R12.2 U2.35 | length 10.7
  Top Layer w0.152: v1(119.291,91.026) 119.291,91.645 120.869,93.224 v1(120.869,97.676)
  Bottom Layer w0.152: v1(119.291,91.026) 121.109,91.026 U2.35@121.142,90.993 ; R12.2@120.844,99.235 120.869,99.21 v1(120.869,97.676)
NetR33_2: R33.2 U3.201 | length 4.1
  Bottom Layer w0.152: U3.201@202.349,129.914 202.366,129.898 203.472,129.898 204.413,128.956 R33.2@206.049,128.956
NetR48_2: R48.2 R49.2 U8.4 | length 4.8
  Bottom Layer w0.152: U8.4@131.206,124.493 R49.2@133.956,124.493 R48.2@133.956,126.55
NetR50_2: R50.2 R51.1 U8.3 | length 23.1
  Top Layer w0.152: v1(128.506,125.755) 128.506,111.139 128.721,110.925 v1(130.916,110.925)
  Bottom Layer w0.152: U8.3@128.506,124.493 v1(128.506,125.755) ; R51.1@130.9,112.175 R51.1@130.916,112.159 ; v1(130.916,110.925) R51.1@130.916,112.159 ; R50.2@134.354,112.159 R51.1@130.916,112.159
NetR56_1: R56.1 U12.2 | length 4.8
  Bottom Layer w0.152: R56.1@32.456,53.74 33.771,53.74 33.861,53.829 U12.2@33.861,57.206
NetR57_1: R57.1 R59.1 U12.4 | length 6.9
  Bottom Layer w0.152: R57.1@30.412,53.762 30.412,56.149 ; R59.1@30.418,57.232 30.412,57.226 30.412,56.149 ; U12.4@32.861,57.206 32.861,56.238 32.771,56.149 30.412,56.149
NetR58_1: R58.1 R60.1 U12.5 | length 9.4
  Bottom Layer w0.152: R58.1@28.286,53.711 28.292,53.717 R60.1@28.292,57.205 28.343,57.256 28.343,58.123 28.432,58.212 32.271,58.212 32.361,58.123 U12.5@32.361,57.206
NetR65_1: R65.1 U3.35 | length 194.7
  Top Layer w0.152: v1(76,73.325) 76.575,73.325 77.045,72.855 89.986,72.855 95.473,78.342 95.473,80.602 95.041,81.034 95.041,102.95 96.466,104.375 109.944,104.375 110.263,104.056 123.259,104.056 123.348,104.146 123.348,105.577 123.069,105.856 v1(123.069,106.458)
  Bottom Layer w0.152: R65.1@44.4,57.561 44.4,61.55 44.6,61.75 46.41,61.75 51.653,66.992 74.987,66.992 76.029,68.035 76.029,73.296 v1(76,73.325) ; v1(123.069,106.458) 123.374,106.763 138.759,106.763 142.95,110.953 156.729,110.953 160.865,115.09 182.886,115.09 183.349,115.553 U3.35@183.349,124.414
NetR389_1: R389.1 U342.3 | length 3.2
  Top Layer w0.152: U342.3@158.45,55.96 U342.3@158.45,55.96 v1(159.956,55.959)
  Bottom Layer w0.152: v1(159.956,55.959) R389.1@161.619,55.959
NetS0_4: S0.4 S1.2 | length 10.3
  Top Layer w0.152: S0.4@52.01,66.024 S1.2@62.315,66.024
NetS1_4: S1.4 S2.2 | length 10.3
  Top Layer w0.152: S1.4@70.315,66.024 S2.2@80.615,66.024
NetS2_4: S2.4 S3.2 | length 10.3
  Top Layer w0.152: S2.4@88.615,66.024 S3.2@98.915,66.024
NetS3_4: S3.4 S4.2 | length 10.3
  Top Layer w0.152: S3.4@106.915,66.024 S4.2@117.215,66.024
NetS4_4: S4.4 S5.2 | length 10.3
  Top Layer w0.152: S4.4@125.215,66.024 S5.2@135.515,66.024
NetS6_4: S6.4 S7.2 | length 10.3
  Top Layer w0.152: S6.4@52.01,55.83 S7.2@62.315,55.83
NetS7_4: S7.4 S8.2 | length 10.3
  Top Layer w0.152: S7.4@70.315,55.83 S8.2@80.615,55.83
NetS8_4: S8.4 S9.2 | length 10.3
  Top Layer w0.152: S8.4@88.615,55.83 S9.2@98.915,55.83
NetS9_4: S9.4 S10.2 | length 10.3
  Top Layer w0.152: S9.4@106.915,55.83 S10.2@117.215,55.83
NetS10_4: S10.4 S11.2 | length 10.3
  Top Layer w0.152: S10.4@125.215,55.83 S11.2@135.515,55.83
NetS12_4: S12.4 S13.2 | length 10.3
  Top Layer w0.152: S12.4@52.01,45.62 S13.2@62.315,45.62
NetS13_4: S13.4 S14.2 | length 13
  Top Layer w0.152: S13.4@70.315,45.62 70.409,45.714 70.409,46.965 70.587,47.142 80.34,47.142 80.615,46.868 S14.2@80.615,45.62
NetS14_4: S14.4 S15.2 | length 10.3
  Top Layer w0.152: S14.4@88.615,45.62 S15.2@98.915,45.62
NetS15_4: S15.4 S16.2 | length 14.5
  Top Layer w0.152: S15.4@106.915,45.62 106.915,41.802 107.139,41.578 111.127,41.578 112.28,40.425 S16.2@117,40.425
NetS16_4: S16.4 S17.2 | length 15.3
  Top Layer w0.152: S16.4@125.215,40.5 129.247,40.5 129.336,40.589 129.336,45.511 129.425,45.6 135.495,45.6 S17.2@135.515,45.62
NetS18_4: S18.4 S19.2 | length 10.3
  Top Layer w0.152: S18.4@52.01,35.435 S19.2@62.315,35.435
NetS19_4: S19.4 S20.2 | length 12.8
  Top Layer w0.152: S19.4@70.315,35.435 70.46,35.58 70.46,36.69 70.549,36.779 80.493,36.779 80.615,36.657 S20.2@80.615,35.435
NetS20_4: S20.4 S21.2 | length 10.3
  Top Layer w0.152: S20.4@88.615,35.435 S21.2@98.915,35.435
NetS21_4: S21.4 S22.2 S44.4 | length 182.6
  Top Layer w0.152: v1(26.7,96.9) 26.7,33.555 27.005,33.25 ; v1(106.915,33.775) S21.4@106.915,35.435 106.948,35.402 115.455,35.402 115.878,34.978 125.074,34.978 125.395,35.3 135.38,35.3 S22.2@135.515,35.435
  Bottom Layer w0.152: v1(26.7,96.9) 29.625,96.9 30.151,97.426 S44.4@30.151,100.454 ; 30.3,28.262 74.818,28.262 76.254,29.698 99.998,29.698 100.625,30.325 100.625,34.103 100.737,34.215 106.475,34.215 v1(106.915,33.775)
NetU12_10: U12.10 U13.3 U13.11 | length 15
  Top Layer w0.152: v1(34.003,67.975) 34.003,63.868 v1(34.671,63.2)
  Bottom Layer w0.152: U13.3@32.733,75.196 32.733,72.974 34.003,71.704 U13.11@34.003,69.608 33.866,69.47 34.003,69.333 v1(34.003,67.975) ; U12.10@34.361,61.256 34.361,62.489 34.671,62.8 v1(34.671,63.2)
NRST: M1d.2 R32.2 U3.37 | length 71.5
  Top Layer w0.152: v1(180.209,126.206) 180.209,130.135 182.177,132.104 187.996,132.104 189.711,133.819 189.711,143.052 v1(188.349,144.414) ; v1(195.849,150.093) 195.225,150.717 195.225,156.647 196.211,157.633 v1(202.06,157.633) ; v1(211.725,160.299) 212.403,160.299 M1d.2@212.563,160.458
  Bottom Layer w0.152: v1(180.209,126.206) 180.582,126.579 182.444,126.579 182.849,126.174 182.849,125.349 182.76,125.26 182.709,125.26 182.349,124.9 U3.37@182.349,124.414 ; v1(188.349,144.414) 195.115,144.414 195.849,145.149 v1(195.849,150.093) v1@195.849,150.24 ; v1(202.06,157.633) 204.313,159.886 209.701,159.886 ; R32.2@209.509,158.195 209.701,158.387 209.701,159.886 ; v1(211.725,160.299) 210.114,160.299 209.701,159.886
OTG_HS_DM: J21.3 U3.103 | length 83.6
  Top Layer w0.152: v1(170.825,165.529) 170.825,168.01 171.34,168.525 210.714,168.525 210.803,168.436 210.803,143.114 210.892,143.025
  Bottom Layer w0.152: v1(170.825,165.529) 171.39,164.964 171.39,152.064 172.04,151.414 U3.103@172.849,151.414
OTG_HS_DP: J21.2 U3.104 | length 82.9
  Top Layer w0.152: v1(172.081,165.529) 172.081,167.827 172.473,168.22 210.409,168.22 210.498,168.131 210.498,141.902 211.245,141.155
  Bottom Layer w0.152: v1(172.081,165.529) 172.081,165.431 171.752,165.103 171.752,152.243 172.081,151.914 U3.104@172.849,151.914
PA0: M60.2 U3.45 | length 38
  Top Layer w0.152: M60.2@147.332,118.25 147.352,118.27 v1(148.51,118.27)
  Bottom Layer w0.152: v1(148.51,118.27) 149.816,116.965 176.558,116.965 177.876,118.282 177.876,122.714 178.349,123.187 U3.45@178.349,124.414
PA2: M61.2 U3.47 | length 33.5
  Top Layer w0.152: M61.2@151.55,118.878 M61.2@151.575,118.853 ; M61.2@151.575,119.158 v1(151.575,119.875)
  Bottom Layer w0.152: v1(151.575,119.875) 151.575,118.757 151.82,118.512 177.119,118.512 177.267,118.659 177.267,122.966 177.349,123.049 U3.47@177.349,124.414
PA3: M62.2 U3.54 | length 34.8
  Top Layer w0.152: v1(142.15,127.1) 142.186,127.136 142.24,127.136 142.529,127.425 M62.2@143.799,127.425
  Bottom Layer w0.152: v1(142.15,127.1) 142.2,127.05 144.258,127.05 145.225,126.083 152.814,126.083 154.695,124.201 168.261,124.201 170.974,126.914 U3.54@172.849,126.914
PA6: M63.2 U3.59 | length 24
  Top Layer w0.152: M63.2@150.555,127.05 151,127.05 151.323,127.373 v1(151.323,128.414) v1@151.42,128.414
  Bottom Layer w0.152: v1(151.323,128.414) 152.551,128.414 153.551,129.414 U3.59@172.849,129.414
PA7: M64.2 U3.60 | length 24.7
  Top Layer w0.152: M64.2@148.656,129.333 v1(151,129.333) v1@151.225,129.333
  Bottom Layer w0.152: v1(151,129.333) 152.578,129.333 153.159,129.914 U3.60@172.849,129.914
PA8: M51.2 U3.146 | length 5.7
  Top Layer w0.152: v1(194.523,157.709) M51.2@194.523,158.965
  Bottom Layer w0.152: v1(194.523,157.709) 195.036,157.709 195.349,157.395 U3.146@195.349,153.914
PA9: M75.2 U3.148 | length 10.7
  Top Layer w0.152: v1(197.513,163.023) M75.2@197.513,164.088
  Bottom Layer w0.152: U3.148@196.349,153.914 196.349,158.525 197.513,159.689 v1(197.513,163.023)
PA10: M53.2 U3.147 | length 10.5
  Top Layer w0.152: M53.2@195.472,164.088 195.472,163.023 196.103,162.391 v1(196.103,160.141)
  Bottom Layer w0.152: U3.147@195.849,153.914 195.849,159.886 v1@196.087,160.124
PB0: M65.2 U3.63 | length 31.6
  Top Layer w0.152: M65.2@141.59,132.173 v1(142.529,132.173)
  Bottom Layer w0.152: v1(142.529,132.173) 143.202,131.5 150.338,131.5 150.45,131.388 172.823,131.388 U3.63@172.849,131.414
PB1: M66.2 U3.64 | length 24.5
  Top Layer w0.152: M66.2@148.961,132.691 v1(150.681,132.691) v1@150.655,132.717
  Bottom Layer w0.152: v1(150.681,132.691) 150.681,132.233 150.997,131.917 152.157,131.917 152.159,131.914 U3.64@172.849,131.914
PB5: M15.2 U3.191 | length 6.5
  Top Layer w0.152: M15.2@206.956,132.185 v1(206.956,133.414)
  Bottom Layer w0.152: U3.191@202.349,134.914 203.586,134.914 205.086,133.414 v1(206.956,133.414)
PB12: M70.2 U3.101 | length 22
  Top Layer w0.152: M70.2@151.538,149.092 v1(152.496,149.092)
  Bottom Layer w0.152: v1(152.496,149.092) 152.635,148.953 160.217,148.953 161.678,150.414 U3.101@172.849,150.414
PC1: M67.2 U3.39 | length 43.3
  Top Layer w0.152: M67.2@147.299,114.904 v1(148.729,114.904)
  Bottom Layer w0.152: v1(148.729,114.904) 152.977,114.904 153.773,115.699 181.181,115.699 181.682,116.2 181.682,123.264 181.358,123.588 181.358,124.406 U3.39@181.349,124.414
PC2: R31.1 U3.40 | length 45.8
  Bottom Layer w0.152: R31.1@147.1,112.825 147.1,115.851 147.272,116.023 181.074,116.023 181.349,116.298 181.349,123.049 180.849,123.549 U3.40@180.849,124.414
PC4: M68.2 U3.61 | length 33
  Top Layer w0.152: M68.2@141,128.299 M68.2@140.9,128.2 141.733,128.2 142.026,128.494 v1(142.15,128.494)
  Bottom Layer w0.152: v1(142.15,128.494) 145.054,128.494 146.854,130.293 172.728,130.293 U3.61@172.849,130.414
PC5: M69.2 U3.62 | length 31.6
  Top Layer w0.152: M69.2@141.599,130.15 v1(143.25,130.15)
  Bottom Layer w0.152: v1(143.25,130.15) 145.677,130.15 146.442,130.914 154.174,130.914 U3.62@172.849,130.914
PC6: M50.2 U3.142 | length 11.9
  Top Layer w0.152: M50.2@192.6,163.993 v1(194.08,163.993)
  Bottom Layer w0.152: U3.142@193.349,153.914 193.349,161.606 194.08,162.337 v1(194.08,163.993)
PC13: M2.2 U3.10 | length 16.9
  Top Layer w0.152: v1(208.304,122.433) 208.812,121.925 M2.2@209.716,121.925
  Bottom Layer w0.152: U3.10@195.849,124.414 195.849,125.78 195.938,125.87 200.912,125.87 203.528,123.254 207.483,123.254 v1(208.304,122.433)
PD3: M14.2 U3.173 | length 4.5
  Top Layer w0.152: v1(205.275,144.55) M14.2@206.514,144.55 ; M14.2@206.502,144.64 M14.2@206.525,144.618
  Bottom Layer w0.152: U3.173@202.349,143.914 204.139,143.914 204.775,144.55 v1(205.275,144.55)
PD4: M85.2 U3.174 | length 3.6
  Top Layer w0.152: v1(201.03,143.914) 202.265,143.914 202.354,144.004 M85.2@202.354,144.751
  Bottom Layer w0.152: v1(201.03,143.914) 201.53,143.414 U3.174@202.349,143.414
PD6: M9.2 U3.176 | length 9.7
  Top Layer w0.152: M9.2@199.783,137.2 198.953,137.2 198.864,137.289 198.864,142.233 199.306,142.675 v1(200.943,142.675)
  Bottom Layer w0.152: v1(200.943,142.675) 201.03,142.588 201.347,142.588 201.521,142.414 U3.176@202.349,142.414
PD7: M8.2 U3.177 | length 2.6
  Top Layer w0.152: v1(201.125,141.925) M8.2@202.465,141.925
  Bottom Layer w0.152: v1(201.125,141.925) 201.13,141.92 202.344,141.92 U3.177@202.349,141.914
PD12: M76.2 U3.111 | length 44.6
  Top Layer w0.152: M76.2@148.082,137.914 v1(149.666,137.914) ; v1(165.296,139.696) 170.779,139.696 171.031,139.948 176.67,139.948 177.635,140.914 177.635,145.282 v1(178.662,146.308)
  Bottom Layer w0.152: v1(149.666,137.914) 162.54,137.914 164.322,139.696 v1(165.296,139.696) ; U3.111@177.849,153.914 177.849,147.476 178.021,147.304 178.021,146.949 v1(178.662,146.308)
PD13: M78.2 U3.112 | length 41.9
  Top Layer w0.152: M78.2@148.107,139.945 v1(149.604,139.945) ; v1(163.197,143.613) 173.835,143.613 174.332,144.11 175.422,144.11 v1(178.555,147.243)
  Bottom Layer w0.152: v1@149.635,139.914 154.324,139.914 154.824,140.414 154.824,143.015 155.422,143.613 v1(163.197,143.613) ; U3.112@178.349,153.914 178.343,153.908 178.343,153.24 178.154,153.052 178.154,152.243 178.349,152.047 178.349,148.026 178.555,147.82 v1(178.555,147.243)
PE2: M77.2 U3.1 | length 72.6
  Top Layer w0.152: M77.2@144.4,136.945 v1(149.666,136.945) ; v1(168.771,136.596) v1(189.109,136.596) ; v1(200.591,133.837) 201.384,133.837 202.036,133.185 v1(202.036,122.737)
  Bottom Layer w0.152: v1@149.697,136.914 168.452,136.914 v1(168.771,136.596) ; v1(189.109,136.596) 191.879,133.825 v1@200.578,133.825 ; U3.1@200.349,124.414 200.349,123.331 200.943,122.737 v1(202.036,122.737)
PF7: M52.2 U3.31 | length 11.1
  Top Layer w0.152: M52.2@185.349,113.282 v1(185.349,114.442)
  Bottom Layer w0.152: v1(185.349,114.442) U3.31@185.349,124.414
PG2: M12.2 U3.130 | length 2.3
  Top Layer w0.152: M12.2@186.313,152.664 v1(187.319,152.664)
  Bottom Layer w0.152: v1(187.319,152.664) 187.334,152.679 187.334,153.899 U3.130@187.349,153.914
PG3: M11.2 U3.131 | length 2.4
  Top Layer w0.152: v1(188.247,155.339) M11.2@188.247,156.145
  Bottom Layer w0.152: U3.131@187.849,153.914 187.849,154.94 v1(188.247,155.339)
PG6: M10.2 U3.136 | length 10.3
  Top Layer w0.152: v1(190.698,162.769) M10.2@190.698,164.027
  Bottom Layer w0.152: U3.136@190.349,153.914 190.25,154.013 190.25,161.561 190.698,162.009 v1(190.698,162.769)
PG9: M13.2 U3.180 | length 3.5
  Top Layer w0.152: M13.2@199.849,139.168 199.849,139.966 199.976,140.093 v1(201.164,140.093)
  Bottom Layer w0.152: v1(201.164,140.093) 201.178,140.093 201.499,140.414 U3.180@202.349,140.414
PG10: M3.2 U3.181 | length 3.4
  Top Layer w0.152: v1@203.642,139.928 v1(203.622,139.948) M3.2@205.286,139.948 ; M3.2@205.539,139.999 205.539,140.366 M3.2@205.552,140.38
  Bottom Layer w0.152: U3.181@202.349,139.914 202.366,139.931 203.605,139.931 v1(203.622,139.948)
PG11: M71.2 U3.182 | length 9.1
  Top Layer w0.152: v1(208.937,138.962) 208.937,137.01 208.987,136.96 M71.2@208.987,136.68
  Bottom Layer w0.152: U3.182@202.349,139.414 208.586,139.414 208.937,139.063 v1(208.937,138.962)
PG12: M73.2 U3.183 | length 13.4
  Top Layer w0.152: v1(209.837,138.062) 209.863,138.062 211.6,136.325 M73.2@211.6,133.266
  Bottom Layer w0.152: U3.183@202.349,138.914 207.967,138.914 208.807,138.075 209.824,138.075 v1(209.837,138.062)
PG13: M74.2 U3.184 | length 11.5
  Top Layer w0.152: v1(207.2,138.075) 207.2,135.009 208.304,133.905 209.501,133.905 209.682,133.725 M74.2@209.682,133.266
  Bottom Layer w0.152: U3.184@202.349,138.414 206.861,138.414 v1(207.2,138.075)
PG14: M7.2 U3.185 | length 4.9
  Top Layer w0.152: M7.2@206.049,136.629 206.1,136.68 v1(206.1,137.625)
  Bottom Layer w0.152: U3.185@202.349,137.914 205.811,137.914 v1(206.1,137.625)
PH1: M17.2 U3.36 | length 38.8
  Top Layer w0.152: v1(153.959,115.131) M17.2@153.959,115.96
  Bottom Layer w0.152: v1(153.959,115.131) 154.014,115.131 154.277,115.395 182.76,115.395 182.849,115.484 U3.36@182.849,124.414
PH6: M5.2 U3.92 | length 21.6
  Top Layer w0.152: M5.2@151.42,145.414 v1(153.68,145.414)
  Bottom Layer w0.152: v1(153.68,145.414) 154.324,145.414 154.824,145.914 U3.92@172.849,145.914
PH7: M4.2 U3.93 | length 21.7
  Top Layer w0.152: M4.2@151.512,147.222 v1(152.496,147.222)
  Bottom Layer w0.152: v1(152.496,147.222) 154.017,147.222 154.824,146.414 U3.93@172.849,146.414
PHONES_L: C1.2 J3UI.A15 P324.1 R7.1 | length 111.4
  Top Layer w0.254: v1(51.249,162.674) 57.611,162.674 58.684,163.746 61.846,163.746 62.55,164.45 v1(66.85,164.45)
  Bottom Layer w0.254: v1(51.249,162.674) 51.249,164.769 51.43,164.95 ; R7.1@66.725,82.461 70.125,82.461 72.211,82.461 72.65,82.9 72.65,161.418 71.77,162.298 69.57,162.298 69.421,162.447 P324.1@69.421,163.297 69.421,164.272 69.243,164.45 v1(66.85,164.45)
PHONES_R: C2.2 J3UI.A13 R8.2 | length 122.4
  Top Layer w0.254: v1(48.89,163.8) 48.89,163.059 49.859,162.09 57.783,162.09 59.033,163.34 62.015,163.34 62.475,163.8 v1(65.525,163.8)
  Bottom Layer w0.254: v1(48.89,163.8) 48.89,164.95 ; R8.2@53.45,82.386 53.497,82.433 C2.2@57.05,82.433 58.987,82.433 62.579,86.025 71.425,86.025 72.244,86.844 72.244,91.331 72.244,161.17 71.522,161.891 68.05,161.891 66.141,163.8 v1(65.525,163.8)
PI8: M18.2 U3.9 | length 18.3
  Top Layer w0.152: M18.2@207.507,117.265 v1(207.507,121.925)
  Bottom Layer w0.152: U3.9@196.349,124.414 196.349,125.243 196.671,125.565 200.765,125.565 203.421,122.909 206.453,122.909 v1@207.519,121.843
PI11: M6.2 U3.15 | length 21
  Top Layer w0.152: v1(208.475,123.575) 208.482,123.582 M6.2@208.482,124.825
  Bottom Layer w0.152: U3.15@193.349,124.414 193.333,124.431 193.333,126.198 193.138,126.393 193.138,126.94 193.654,127.456 194.838,127.456 196.12,126.174 201.038,126.174 203.622,123.591 v1@208.467,123.591
PI15: M16.2 U3.66 | length 3.2
  Top Layer w0.152: v1(170.933,132.76) 170.982,132.711 M16.2@170.982,131.563
  Bottom Layer w0.152: v1(170.933,132.76) 171.059,132.76 171.078,132.742 171.251,132.914 U3.66@172.849,132.914
POWER_BUTTON: C48.2 D120.1 M71.1 TS1.a | length 127.9
  Top Layer w0.152: M71.1@208.987,134.966 209.818,134.966 210.675,134.108 210.675,127.347 v1(212.108,125.914) ; v1(217.075,125.915) 217.075,117.675 217.525,117.225 222.475,117.225 222.7,117 v1(222.7,88.45)
  Bottom Layer w0.152: C48.2@199,36.725 203.067,36.725 203.252,36.91 203.252,75.799 203.341,75.888 210.423,75.888 210.757,76.222 210.757,86.313 211.305,86.861 218.07,86.861 218.686,86.245 ; v1(212.108,125.914) v1(217.075,125.915) ; TS1.a@222.7,88.425 v1(222.7,88.45)
POWER_HOLD: D123.1 M2.1 | length 109.4
  Top Layer w0.152: M2.1@211.431,121.925 211.431,119.345 211.854,118.922 211.854,92.822 211.6,92.567 v1(211.6,92.504)
  Bottom Layer w0.152: D123.1@187.425,35.125 188.925,35.125 190.19,36.39 194.206,36.39 194.538,36.721 194.538,39.931 194.695,40.088 202.386,40.088 202.642,40.344 202.642,76.052 203.186,76.595 209.926,76.595 210.147,76.816 210.147,92.031 210.619,92.504 v1(211.6,92.504)